# Altium PCB AQCA-Light-Control-A0.PcbDoc (part 2 of 2)
Units mm, origin at the board's own origin, x right, y up, seen from the top; angles counter-clockwise.
Board outline 100 x 100 mm, 2 copper layers (Top Layer, Bottom Layer); 147 components, 99 nets, 439 pads, 162 vias.
Unrouted connection lines stored in the file: 13.
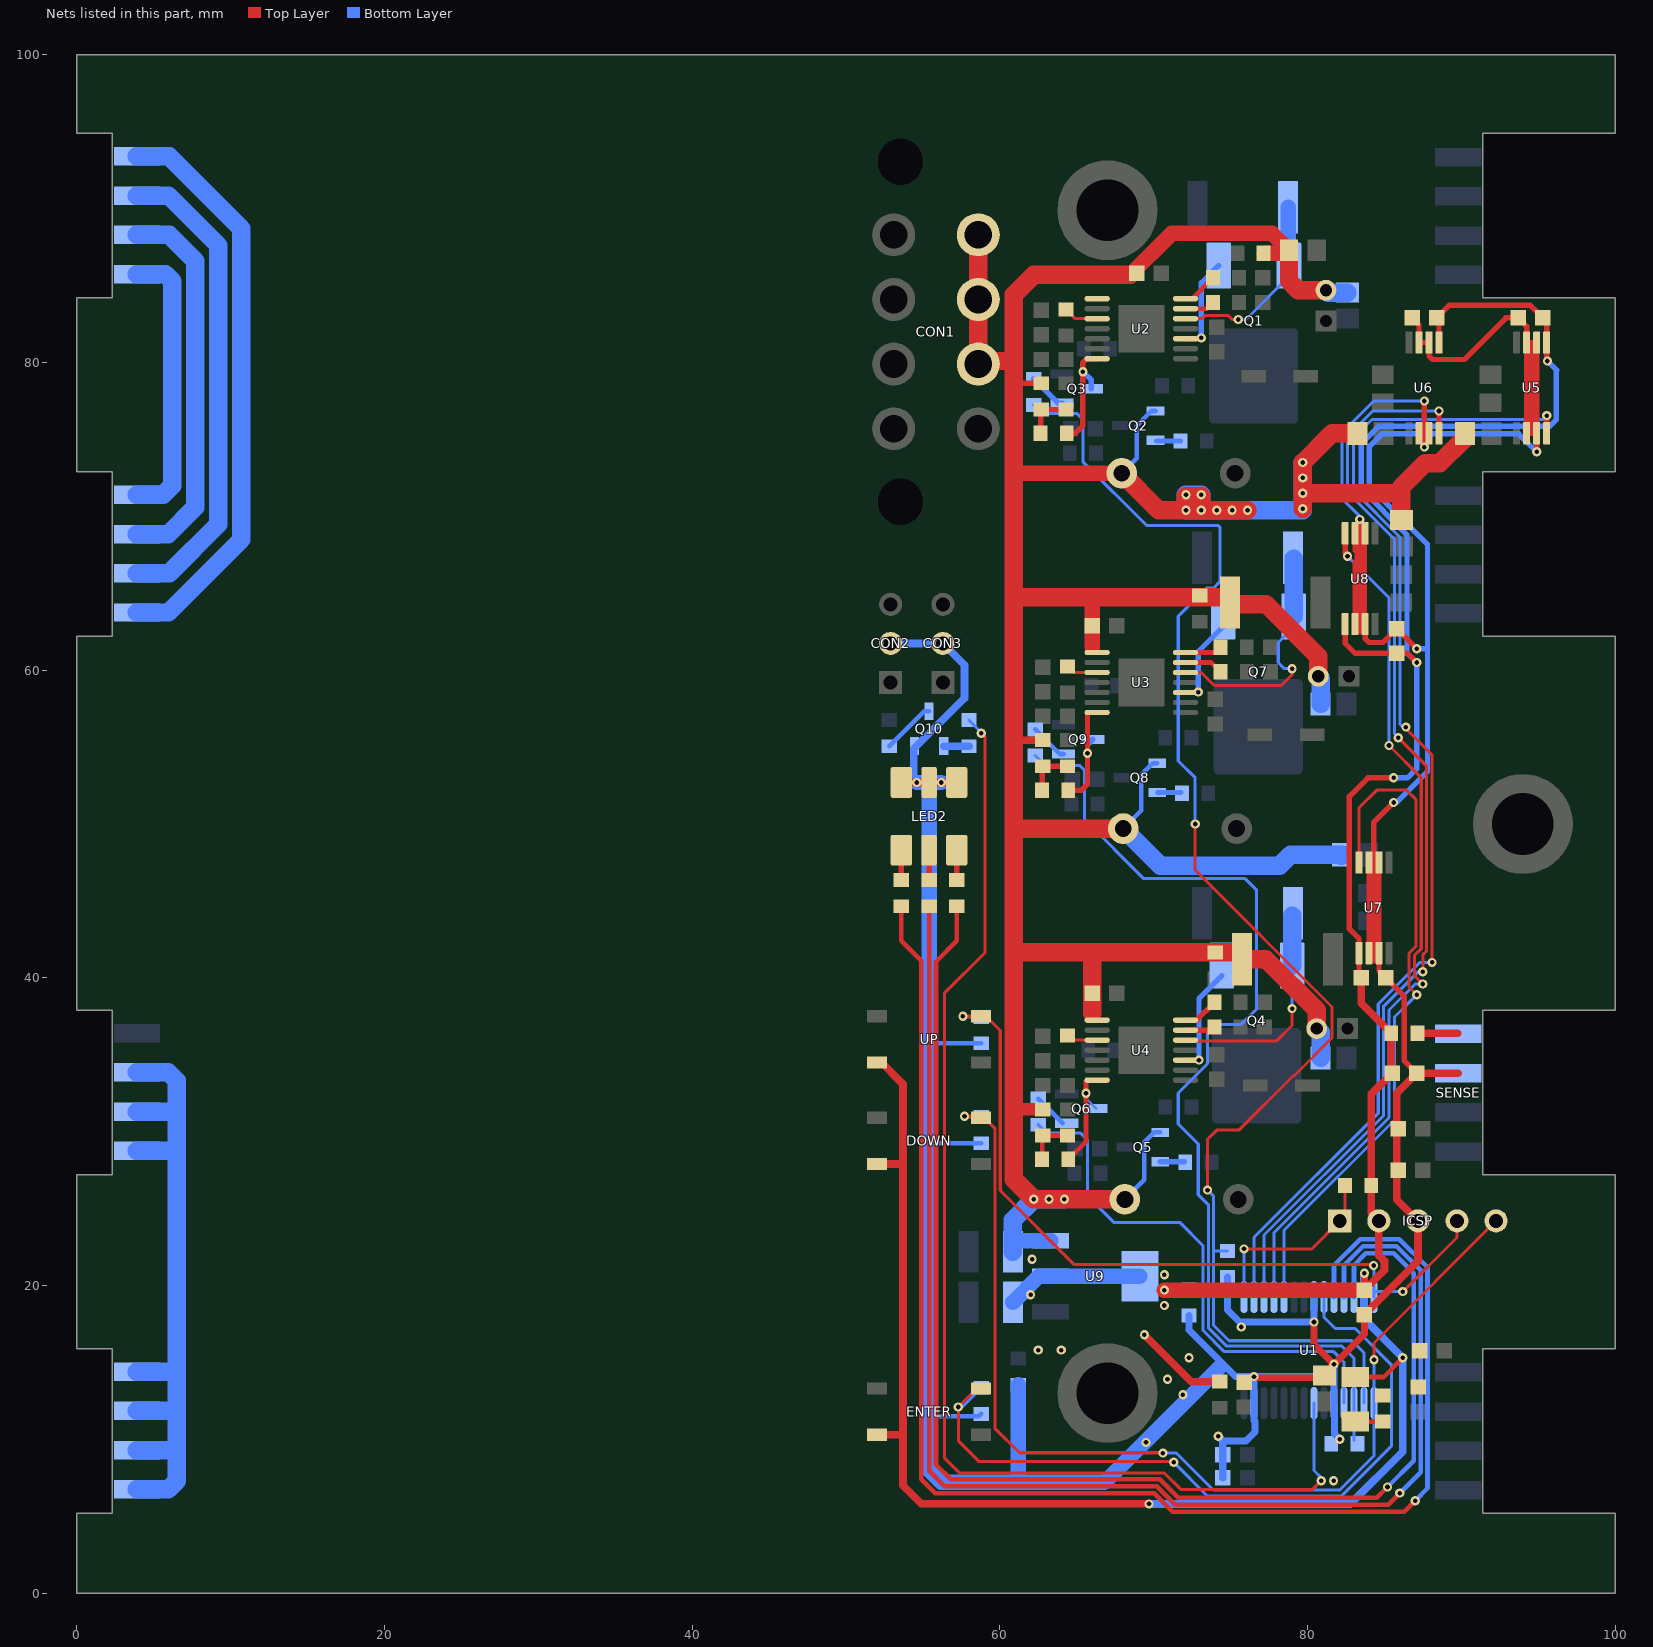
[diagram p2: the nets of this part, all layers, seen from the top]

## Via types
v1: diameter 0.6, hole 0.3, Top Layer to Bottom Layer, tented both sides, 132 vias
v2: diameter 0.5, hole 0.3, Top Layer to Bottom Layer, tented both sides, 27 vias
v3: diameter 0.6, hole 0.3, Top Layer to Bottom Layer, 3 vias

## Nets (pads, with @x,y where several pads share a name; then routed paths per layer and width w, separated by ;. In a path a pad name is that pad's centre, name@x,y a point inside that pad or via, vN(x,y) a via of type N, cw(c..) or ccw(c..) an arc to the next point about the centre after c; other vN are vias at no path point) (continued)
NetDOWN_2: DOWN.4 ICSP.5 R52.2 U1.15 | length 68.6
  Top Layer w0.2: v1(57.7,31) DOWN.4@58.675,31 ; DOWN.4@58.775,30.9 59,30.9 59.677,30.223 59.677,10.723 61.275,9.125 70.575,9.125 v1(70.6,9.1) ; v1(84.325,15.175) 84.325,16.265 ICSP.5@92.26,24.2
  Bottom Layer w0.2: v1(57.7,31) 57.75,30.95 R52.2@58.8,30.95 ; v1(70.6,9.1) 71.481,9.1 73.881,6.7 82.1,6.7 84.325,8.925 U1.15@84.325,12.35 v1(84.325,15.175)
NetENTER_2: ENTER.4 R57.2 U1.9 | length 49.5
  Top Layer w0.2: ENTER.4@58.5,13.3 v1(57.3,12.1) 57.3,9.9 58.652,8.548 71.252,8.548 v1(71.3,8.5) ; ENTER.4@58.775,13.3 ENTER.4@59.1,13.3
  Bottom Layer w0.2: v1(57.3,12.1) 57.55,12.1 R57.2@58.8,13.35 ; v1(71.3,8.5) 73.5,6.3 82.198,6.3 85.452,9.554 85.452,14.848 83.1,17.2 81.8,17.2 81.075,17.925 U1.9@81.075,19.25
NetICSP_1: ICSP.1 R20.1 U1.1 | length 12.1
  Top Layer w0.2: v1(75.875,22.375) 80.275,22.375 ICSP.1@82.1,24.2 ; ICSP.1@82.45,24.55 R20.1@82.45,26.5
  Bottom Layer w0.2: U1.1@75.875,19.25 v1(75.875,22.375)
NetICSP_4: ICSP.4 R51.2 U1.14 UP.4 | length 50.3
  Top Layer w0.2: v1(57.6,37.5) UP.4@58.775,37.5 ; UP.4@59.1,37.5 60.03,36.57 60.03,26.17 64.848,21.352 84.248,21.352 v1(84.3,21.3) ; v1(86.2,19.6) 89.72,23.12 ICSP.4@89.72,24.2
  Bottom Layer w0.2: v1(57.6,37.5) 57.65,37.45 R51.2@58.8,37.45 ; U1.14@84.325,19.25 v1@84.325,21.3 ; U1.14@84.4,19.6 v1(86.2,19.6)
NetLED1_K: LED1.K R53.2 | length 1.8
  Top Layer w0.3: LED1.K@83.1,11.15 R53.2@84.9,11.15
NetLED2_AB: LED2.6 R56.2 | length 1.9
  Top Layer w0.35: R56.2@57.2,46.35 LED2.6@57.2,48.3
NetLED2_AG: LED2.2 R55.2 | length 1.9
  Top Layer w0.35: R55.2@53.6,46.35 LED2.2@53.6,48.3
NetLED2_AR: LED2.4 R54.2 | length 1.9
  Top Layer w0.35: R54.2@55.4,46.35 LED2.4@55.4,48.3
NetLEDAterm_1: pad.1@3.9,63.75 pad.4@3.9,93.4 | length 37.7
  Bottom Layer w1.2: pad.1@3.9,63.75 5.95,63.75 10.7,68.5 10.7,88.7 6,93.4 pad.4@3.9,93.4
NetLEDAterm_2: pad.2@3.9,66.3 pad.3@3.9,90.85 | length 31.4
  Bottom Layer w1.2: pad.2@3.9,66.3 6,66.3 9.2,69.5 9.2,87.6 5.95,90.85 pad.3@3.9,90.85
NetLEDAterm_3: pad.2@3.9,88.3 pad.3@3.9,68.85 | length 25
  Bottom Layer w1.2: pad.3@3.9,68.85 5.95,68.85 7.7,70.6 7.7,86.6 6,88.3 pad.2@3.9,88.3
NetLEDAterm_4: pad.1@3.9,85.75 pad.4@3.9,71.4 | length 18.3
  Bottom Layer w1.2: pad.4@3.9,71.4 5.6,71.4 6.2,72 6.2,85.3 5.75,85.75 pad.1@3.9,85.75
NetQ1_1: Q1.1 U2.10 | length 6.2
  Top Layer w0.35: U2.10@72.075,81.55 73.05,81.55 v1(73.1,81.6)
  Bottom Layer w0.35: v1(73.1,81.6) 73.1,85.175 Q1.1@74.225,86.3
NetQ1_2: Q1.3 R11.2 U2.12 | length 11.8
  Top Layer w0.2: U2.12@72.075,82.85 73.15,82.85 73.352,83.052 74.847,83.052 75.1,82.8 v1(75.5,82.8)
  Bottom Layer w0.2: v1(75.5,82.8) 76,82.8 Q1.3@78.8,85.6
  Bottom Layer w1: Q1.3@78.75,86.35 R11.2@78.75,90.1
NetQ2_2: Q2.2 R9.1 | length 1.6
  Bottom Layer w0.3: Q2.2@70.175,74.9 R9.1@71.75,74.9
NetQ3_1: Q3.1 R14.1 | length 2.5
  Bottom Layer w0.35: R14.1@62.2,78.95 63.8,77.35 Q3.1@64.05,77.35
NetQ3_3: Q3.3 R12.1 U2.7 | length 7.7
  Top Layer w0.35: R12.1@64.35,75.4 64.9,75.4 65.4,75.9 v1(65.4,79.4) 65.4,80 65.65,80.25 U2.7@66.325,80.25
  Bottom Layer w0.35: v1(65.4,79.4) 65.95,78.85 Q3.3@65.95,78.3
NetQ4_1: Q4.1 U4.10 | length 7
  Top Layer w0.35: U4.10@72.075,34.65 v1(72.95,34.65)
  Bottom Layer w0.35: v1(72.95,34.65) 72.95,38.65 Q4.1@74.425,40.125
NetQ4_2: Q4.3 R30.2 U4.12 | length 14.5
  Top Layer w0.2: U4.12@72.075,35.95 72.125,35.9 78,35.9 79,36.9 v1(79,38)
  Bottom Layer w0.2: v1(79,38) Q4.3@79,40.8
  Bottom Layer w1.2: Q4.3@79,40.8 R30.2@79,44.05
NetQ5_2: Q5.2 R28.1 | length 1.6
  Bottom Layer w0.35: Q5.2@70.425,28.05 R28.1@72,28.05
NetQ6_1: Q6.1 R34.1 | length 2.3
  Bottom Layer w0.3: R34.1@62.5,32.15 Q6.1@64.1,30.55
NetQ6_3: Q6.3 R31.1 U4.7 | length 6.8
  Top Layer w0.3: R31.1@64.45,28.2 65.6,29.35 v1(65.6,32.5) U4.7@65.6,33.3
  Bottom Layer w0.2: v1(65.6,32.5) 65.6,32.15 Q6.3@66.25,31.5
NetQ7_1: Q7.1 U3.10 | length 5.9
  Top Layer w0.35: U3.10@72.075,58.55 72.95,58.55 72.927,58.573 v1(72.9,58.573)
  Bottom Layer w0.35: v1(72.9,58.573) 72.9,61.2 Q7.1@74.525,62.825
NetQ7_2: Q7.3 R45.2 U3.12 | length 15.4
  Top Layer w0.2: U3.12@72.075,59.85 73.093,59.85 73.943,59 78.3,59 79,59.7 v1(79,60.1)
  Bottom Layer w0.2: v1(79,60.1) 78.5,60.1 78.1,60.5 78.1,61.8 Q7.3@79,62.7
  Bottom Layer w1.2: Q7.3@79.1,63.5 R45.2@79.1,67.25
NetQ8_2: Q8.2 R43.1 | length 1.6
  Bottom Layer w0.3: Q8.2@70.225,52.05 R43.1@71.8,52.05
NetQ9_1: Q9.1 R49.1 | length 2.5
  Bottom Layer w0.3: R49.1@62.3,56.15 63.9,54.55 Q9.1@64.15,54.55
NetQ9_3: Q9.3 R46.1 U3.7 | length 7.1
  Top Layer w0.35: R46.1@64.45,52.2 65.3,52.2 65.7,52.6 v1(65.7,54.6) U3.7@65.7,57.2
  Bottom Layer w0.35: v1(65.7,54.6) 65.7,55.15 Q9.3@66.05,55.5
NetQ10_1: Q10.3 R62.2 | length 1.6
  Bottom Layer w0.5: Q10.3@56.375,55.05 R62.2@58,55.05
NetQ10_3: Q10.1 R61.1 | length 3.5
  Bottom Layer w0.3: R61.1@52.8,55.05 55.075,57.325 Q10.1@55.4,57.325
NetR3_2: R3.2 U2.14 | length 2.3
  Top Layer w0.3: U2.14@72.075,84.15 72.5,84.15 R3.2@73.85,85.5
NetR5_1: R5.1 U2.13 | length 1.9
  Top Layer w0.3: U2.13@72.075,83.5 73.45,83.5 R5.1@73.85,83.9
NetR8_1: R8.1 U2.3 | length 2.3
  Top Layer w0.2: R8.1@64.3,83.45 64.9,82.85 U2.3@66.325,82.85
NetR10_1: R10.1 R12.2 R13.2 | length 3.2
  Top Layer w0.35: R12.2@62.65,75.4 62.65,76.9 R10.1@62.7,76.95 R13.2@64.3,76.95
NetR14_2: R14.2 R58.1 U1.16 | length 93.5
  Top Layer w0.2: v1(72.7,50) 72.7,47.005 81.6,38.105 81.6,36.1 79.152,33.652 79.095,33.652 75.543,30.1 74.1,30.1 73.5,29.5 v1(73.5,26.2)
  Bottom Layer w0.2: R14.2@62.2,77.25 62.75,76.7 65,76.7 65.4,76.3 65.4,73.554 69.554,69.4 74.2,69.4 74.3,69.3 74.3,65.743 73.905,65.348 73.448,65.348 71.6,63.5 71.6,54.1 72.7,53 v1(72.7,50) ; v1(73.5,26.2) 73.905,25.795 73.905,17.395 74.895,16.405 82.895,16.405 83.675,15.625 U1.16@83.675,12.35 ; 73.955,22.25 R58.1@74.8,22.25
NetR19_2: R19.2 SENSE.1 | length 2.6
  Top Layer w0.5: R19.2@87.15,36.4 89.75,36.4
NetR23_2: R23.2 U4.14 | length 2.4
  Top Layer w0.35: U4.14@72.075,37.25 72.8,37.25 R23.2@73.95,38.4
NetR25_1: R25.1 U4.13 | length 2
  Top Layer w0.35: U4.13@72.075,36.6 73.75,36.6 R25.1@73.95,36.8
NetR27_1: R27.1 U4.3 | length 1.6
  Top Layer w0.2: R27.1@64.7,35.95 U4.3@66.325,35.95
NetR29_1: R29.1 R31.2 R33.2 | length 3.2
  Top Layer w0.3: R31.2@62.75,28.2 62.75,29.7 R29.1@62.8,29.75 R33.2@64.4,29.75
NetR34_2: R34.2 R59.1 U1.18 | length 35.2
  Bottom Layer w0.2: R34.2@62.5,30.45 63.05,29.9 65.257,29.9 65.7,29.457 65.7,25.8 67.4,24.1 71.7,24.1 73.2,22.6 73.2,17.1 74.6,15.7 81.7,15.7 82.375,15.025 U1.18@82.375,12.35 ; R59.1@72.3,19.75 73.15,19.75
NetR38_2: R38.2 U3.14 | length 2.4
  Top Layer w0.3: U3.14@72.075,61.15 74,61.15 R38.2@74.35,61.5
NetR40_1: R40.1 U3.13 | length 2.4
  Top Layer w0.3: U3.13@72.175,60.5 73.75,60.5 R40.1@74.35,59.9
NetR42_1: R42.1 U3.3 | length 2.1
  Top Layer w0.2: R42.1@64.4,60.25 64.8,59.85 U3.3@66.325,59.85
NetR44_1: R44.1 R46.2 R48.2 | length 3.2
  Top Layer w0.35: R46.2@62.75,52.2 62.75,53.7 R44.1@62.8,53.75 R48.2@64.4,53.75
NetR49_2: R49.2 R60.1 U1.17 | length 68
  Bottom Layer w0.2: R49.2@62.3,54.45 62.95,53.8 65.2,53.8 65.5,53.5 65.5,50.3 69.352,46.448 75.952,46.448 76.7,45.7 76.7,37.977 75.7,36.977 73.865,36.977 73.502,36.614 73.502,34.419 71.6,32.516 71.6,30.5 72.9,29.2 72.9,25.9 73.552,25.248 73.552,17.248 74.748,16.052 82.248,16.052 83.025,15.275 U1.17@83.025,12.35 R60.1@83.025,9.925
NetR54_1: R54.1 U1.11 | length 91.8
  Top Layer w0.3: R54.1@55.4,44.65 55.4,7.948 56.402,6.945 70.215,6.945 71.413,5.748 85.248,5.748 v1(86,6.5)
  Bottom Layer w0.3: U1.11@82.375,19.25 82.375,21.315 83.613,22.552 85.787,22.552 87.352,20.987 87.352,7.852 v1(86,6.5)
NetR55_1: R55.1 U1.10 | length 96.2
  Top Layer w0.3: R55.1@53.6,44.65 53.6,42.4 54.9,41.1 54.9,7.4 55.807,6.493 70.028,6.493 71.225,5.295 86.295,5.295 v1(87,6)
  Bottom Layer w0.3: U1.10@81.725,19.25 81.725,21.305 83.425,23.005 85.975,23.005 87.805,21.175 87.805,6.805 v1(87,6)
NetR56_1: R56.1 U1.12 | length 88.8
  Top Layer w0.3: R56.1@57.2,44.65 57.2,42.4 55.852,41.052 55.852,8.348 56.802,7.398 70.402,7.398 71.6,6.2 84.5,6.2 v1(85.2,6.9)
  Bottom Layer w0.3: U1.12@83.025,19.25 83.025,21.325 83.8,22.1 85.6,22.1 86.9,20.8 86.9,8.6 v1(85.2,6.9)
NetR62_1: R62.1 U1.21 | length 80.2
  Top Layer w0.2: v1(58.8,55.9) 59.048,55.652 59.048,41.646 56.395,38.994 56.395,8.805 57.4,7.8 70.702,7.8 71.754,6.748 80.347,6.748 v1(80.9,7.3)
  Bottom Layer w0.2: R62.1@58,56.75 58.8,55.95 v1(58.8,55.9) ; U1.21@80.425,12.35 80.425,7.975 80.9,7.5 v1@80.9,7.4
NetSENSEterm_1: pad.1@3.9,6.75 pad.1@3.9,28.75 pad.2@3.9,9.3 pad.2@3.9,31.3 pad.3@3.9,11.85 pad.3@3.9,33.85 pad.4@3.9,14.4 | length 44.5
  Bottom Layer w1.2: pad.1@3.9,6.75 5.95,6.75 6.5,7.3 6.5,9.3 ; pad.2@3.9,9.3 6.5,9.3 ; pad.3@3.9,11.85 6.45,11.85 ; pad.4@3.9,14.4 6.5,14.4 ; pad.1@3.9,28.75 6.45,28.75 ; pad.2@3.9,31.3 6.4,31.3 ; pad.3@3.9,33.85 5.95,33.85 6.5,33.3 6.5,14.4 ; 6.5,9.3 6.5,14.4
NetU1_2: U1.2 U5.4 | length 77.6
  Top Layer w0.2: v1(86.4,56.3) 86.4,56.2 88.1,54.5 v1(88.1,41)
  Top Layer w0.35: U5.4@95.55,75.4 v1(95.55,76.55)
  Bottom Layer w0.2: U1.2@76.525,19.25 76.525,23.125 84.6,31.2 84.6,38.3 87.3,41 v1(88.1,41) ; v1(86.4,56.3) 86.205,56.3 86.005,56.5 86.005,68.66 83,71.665 83,75.102 84.196,76.298 95.298,76.298 v1(95.55,76.55)
NetU1_3: U1.3 U6.4 | length 70.7
  Top Layer w0.2: v1(85.9,55.6) 87.748,53.752 87.748,41.748 87.5,41.5 v1@87.5,40.4
  Top Layer w0.35: U6.4@88.55,75.4 v1@88.55,76.65
  Bottom Layer w0.2: U1.3@77.175,19.25 77.175,23.277 84.952,31.054 84.952,38.152 87.2,40.4 v1@87.5,40.4 ; v1(85.9,55.6) 85.652,55.847 85.652,68.514 82.6,71.566 82.6,75.2 84.25,76.85 v1(88.55,76.85) ; v1@88.4,76.8 v1@88.55,76.65
  other v1: 87.5,40.4
NetU1_4: U1.4 U8.4 | length 56.4
  Top Layer w0.2: v1(85.3,55.1) 87.395,53.005 87.395,41.894 86.947,41.446 86.947,40.153 v1(87.5,39.6)
  Top Layer w0.35: U8.4@82.45,68.9 82.45,67.55 v1(82.6,67.4)
  Bottom Layer w0.2: U1.4@77.825,19.25 77.825,23.428 85.305,30.908 85.305,37.905 87,39.6 v1(87.5,39.6) ; v1(82.6,67.4) 85.3,64.7 v1(85.3,55.1)
NetU1_5: U1.5 U7.4 | length 44.3
  Top Layer w0.2: U7.4@83.35,47.5 83.35,51.05 84.5,52.2 86.443,52.2 87.043,51.6 87.043,42.04 86.595,41.592 86.595,39.405 v1(87.1,38.9)
  Bottom Layer w0.2: U1.5@78.475,19.25 78.475,23.58 85.657,30.762 85.657,37.457 v1(87.1,38.9)
V12: C2.2 C3.2 C4.2 C15.2 C16.2 C17.2 C24.2 C25.2 C26.2 C33.1 C34.2 C35.2 C36.2 C37.2 CON1.1 CON1.2 CON1.3 L1.1 L2.1 L3.1 Q2.3 Q5.3 Q8.3 R4.1 R7.2 R10.2 R24.1 R26.2 R29.2 R39.1 R41.2 R44.2 U2.1 U3.1 U4.1 U9.3 | length 265.1
  Top Layer w0.35: 60.9,78.65 R10.2@62.7,78.65
  Top Layer w0.5: 60.95,55.45 R44.2@62.8,55.45
  Top Layer w0.8: 60.95,31.45 R29.2@62.8,31.45 ; C24.2@80.7,59.6 C24.2@80.7,59.781
  Top Layer w1: 61.1,72.8 L1.1@67.925,72.8 ; 66,61.5 C26.2@66,62.9 66,64.75 ; C4.2@68.477,85.7 71.177,88.4 77.7,88.4 R4.1@78.8,87.3 ; R7.2@77.2,87.1 R4.1@78.6,87.1
  Top Layer w1.2: CON1.1@58.6,88.3 CON1.2@58.6,84.1 CON1.3@58.6,79.9 58.8,80.1 60.9,80.1 ; 60.95,41.65 66,41.65 ; 60.95,64.75 66,64.75 R39.1@74.8,64.75 ; 61,49.7 L2.1@68.025,49.7 ; 66,37.7 C17.2@66,39 66,41.65 ; L1.1@67.925,72.8 70.325,70.4 v1(72.1,70.4) ; L3.1@68.125,25.6 v1(62.2,25.6) 60.9,26.9 60.9,78.65 60.9,80.1 ; C4.2@68.477,85.7 62.2,85.7 60.9,84.4 60.9,80.1 ; R39.1@74.95,64.3 77.297,64.3 80.7,60.897 C24.2@80.7,59.781 ; R24.1@75.7,41.65 R26.2@74,41.65 66,41.65 ; R24.1@75.75,41.2 77.3,41.2 80.6,37.9 C15.2@80.6,36.7 ; v1(76.1,70.4) v1(75.1,70.4) v1(74.1,70.4) v1(73.1,70.4) ; R4.1@78.8,87.3 78.8,85.3 79.4,84.7 C2.2@80.8,84.7 ; v1(79.7,70.5) v1(79.7,71.5) ; C34.2@83.25,75.4 81.6,75.4 v1(79.7,73.5) v1(79.7,72.5) v1(79.7,71.5) ; C36.2@86.1,69.75 86.1,71.5 ; C33.1@90.188,75.05 88.585,73.448 87.648,73.448 86.1,71.9 86.1,71.5 ; C33.1@90.25,75.05 C33.1@90.25,75.4 ; v1(72.1,70.4) v1(73.1,70.4) ; v1(72.1,70.4) 72.1,71.3 73.1,71.3 v1(73.1,70.4) ; v1(79.7,71.5) 86.1,71.5
  Bottom Layer w0.3: L1.1@67.925,72.8 68.9,73.775 68.9,75.9 69.85,76.85 Q2.3@70.125,76.85 ; L2.1@68.025,49.7 69.2,50.875 69.2,53.2 69.95,53.95 Q8.3@70.225,53.95 ; L3.1@68.125,25.6 69.4,26.875 69.4,29.3 70.05,29.95 Q5.3@70.425,29.95
  Bottom Layer w1: C37.2@61,22.9 U9.3@63.3,22.9
  Bottom Layer w1.2: C37.2@60.85,22.2 60.85,24.25 v1(62.2,25.6) v1(63.2,25.6) v1(64.2,25.6) ; L2.1@68.025,49.7 70.425,47.3 78.2,47.3 78.9,48 C35.2@82.145,48 ; v1(79.7,73.5) v1(79.7,72.5) v1(79.7,71.5) v1(79.7,70.5) 79.7,70.4 v1(76.1,70.4) v1(75.1,70.4) v1(74.1,70.4) v1(73.1,70.4) ; C15.2@80.6,36.7 80.85,36.45 C16.2@80.85,34.8 ; C24.2@80.7,59.6 80.85,59.45 C25.2@80.85,57.8 ; C2.2@81.2,84.7 81.35,84.55 C3.2@82.6,84.55 ; C35.2@82.198,47.948 C35.2@82.25,48 ; v1(73.1,70.4) v1(73.1,71.4) v1(72.1,71.4) v1(72.1,70.4) v1(73.1,70.4)
VDD: C1.1 C9.1 C12.1 C14.2 C18.1 C27.1 C38.2 DOWN.1 ENTER.1 ICSP.2 LED1.A R18.2 R19.1 R20.2 U1.13 U5.5 U6.5 U7.5 U8.5 U9.2 U9.4 UP.1 | length 209.1
  Top Layer w0.3: LED1.A@83.1,14.05 84.95,14.05 v1(86.2,15.3)
  Top Layer w0.35: U8.5@82.45,63 82.45,61.75 83.1,61.1 C27.1@85.8,61.1 86.5,61.1 v1(87.1,60.5) ; C18.1@83.35,40.15 U7.5@83.35,41.6 83.35,42.55 82.725,43.175 82.725,51.8 83.925,53 v1(85.6,53) ; C9.1@88.4,82.9 89.227,83.727 94.473,83.727 C1.1@95.3,82.9 ; U6.5@88.55,81.3 C9.1@88.55,82.75 ; v1@95.55,80.15 U5.5@95.55,81.3 C1.1@95.55,82.65
  Top Layer w0.45: C12.1@83.7,19.7 v1(83.7,20.8)
  Top Layer w0.5: ENTER.1@52.025,10.3 53.7,10.3 ; DOWN.1@52.025,27.9 53.7,27.9 ; UP.1@52.025,34.5 52.3,34.5 53.7,33.1 53.7,7 54.9,5.8 v1(69.7,5.8) ; v1(69.4,16.8) 72.45,13.75 R18.2@74.3,13.75 ; C18.1@83.5,40 83.5,38.35 R19.1@85.45,36.4 C14.2@85.45,33.85 ; C12.1@83.7,19.7 85.002,21.002 85.002,21.591 84.64,21.953 ICSP.2@84.64,24.2 84.15,24.69 R20.2@84.15,26.5 84.15,32.45 C14.2@85.5,33.8
  Top Layer w1: v1(70.7,19.7) C12.1@83.7,19.7
  Bottom Layer w0.35: v1(85.6,53) 86.5,53 87.1,53.6 v1(87.1,60.5) 86.472,61.128 86.472,68.797 83.5,71.769 83.5,74.731 84.639,75.87 95.757,75.87 96.177,76.29 96.177,79.477 96.2,79.5 v1(95.6,80.1)
  Bottom Layer w0.5: v1(69.7,5.8) 69.702,5.798 82.798,5.798 86.2,9.2 v1(86.2,15.3) 83.675,17.825 U1.13@83.675,19.25 83.675,20.775 v1(83.7,20.8)
  Bottom Layer w1: C38.2@60.85,18.9 62.55,20.6 U9.2@63.3,20.6 U9.4@69.1,20.6
  other v1: 70.9,13.9 72.3,15.3 62.5,15.8 64,15.8 70.7,18.7 62,19.4 70.7,20.7 62.1,21.7
VSS: C1.2 C9.2 C11.2 C12.2 C13.2 C14.1 C18.2 C27.2 C39.2 C40.2 C41.2 C42.2 C43.2 C44.2 CON2.2 CON3.2 ICSP.3 LED2.1 LED2.3 LED2.5 Q10.2 R17.1 R51.1 R52.1 R53.1 R57.1 R58.2 R59.2 R60.2 SENSE.2 U1.8 U1.19 U1.27 U5.2 U5.3 U5.6 U5.7 U6.2 U6.3 U6.6 U6.7 U7.2 U7.3 U7.6 U7.7 U8.2 U8.3 U8.6 U8.7 | length 316.6
  Top Layer w0.35: U8.6@83.1,63 83.1,67.013 83.227,67.14 83.227,67.673 83.1,67.8 U8.3@83.1,68.9 ; 83.4,62.5 83.4,69.4 ; U8.2@83.7,68.9 83.7,63.05 U8.7@83.75,63 83.75,62.05 84,61.8 84.9,61.8 C27.2@85.8,62.7 v1(87.1,61.4) ; 84.3,41.1 84.3,41.6 ; U7.2@84.6,47.5 84.3,47.5 ; U7.2@84.65,47.5 U7.7@84.65,41.6 ; v1(85.6,51.4) 84.3,50.1 84.3,47.5 ; C9.2@86.8,82.9 87.25,82.45 U6.7@87.25,81.3 U6.6@87.9,81.3 87.9,80.427 88.127,80.2 90.2,80.2 92.9,82.9 C1.2@93.7,82.9 94.25,82.35 U5.7@94.25,81.3 ; C14.1@87.1,33.8 86.3,34.6 86.3,38.8 C18.2@85.1,40 84.65,40.45 U7.7@84.65,41.6 ; U6.2@87.25,75.4 87.6,75.4 ; v1(87.6,74.5) 87.6,75.4 ; v1(87.6,77.5) 87.6,75.4 ; U6.3@87.9,75.4 87.6,75.4 ; U5.2@94.25,75.4 U5.7@94.25,81.3 ; U5.2@94.3,75.4 94.6,75.4 ; 94.6,81.275 94.6,75.4 ; v1(94.9,74.2) U5.3@94.9,75.4 ; 84.3,41.6 84.3,47.5 ; 84.3,41.6 U7.7@84.65,41.6 ; 84.3,41.6 U7.6@84,41.6 U7.3@84,47.5 84.3,47.5 ; U5.7@94.25,81.3 U5.6@94.9,81.3 U5.3@94.9,75.4 ; 94.6,75.4 U5.3@94.9,75.4
  Top Layer w0.45: C11.2@76.2,14 80.95,14 C13.2@81.1,14.15 ; v1(80.425,17.625) 80.425,16.175 v1(81.725,14.875) 83.7,16.85 C12.2@83.7,18.1
  Top Layer w0.5: LED2.1@53.6,52.7 LED2.3@55.4,52.7 LED2.5@57.2,52.7 LED2.5@57.2,52.4 ; C11.2@75.89,13.802 C11.2@75.9,13.792 ; C13.2@81.1,14.15 81.1,14.25 v1(81.725,14.875) ; C12.2@83.752,18.1 C12.2@83.7,18.1 87.18,21.58 ICSP.3@87.18,24.2 85.8,25.58 85.8,32.5 C14.1@87.1,33.8 89.8,33.8
  Bottom Layer w0.2: v1(83.4,69.8) 83.4,70 82.248,71.152 82.248,75.433 84.314,77.5 v1(87.6,77.5)
  Bottom Layer w0.3: 55.45,29.25 R52.1@58.8,29.25 ; 55.45,35.75 R51.1@58.8,35.75 ; 55.498,11.498 58.648,11.498 R57.1@58.8,11.65
  Bottom Layer w0.35: v1(85.6,51.4) 85.78,51.4 87.8,53.42 87.8,68.18 84.025,71.955 84.025,74.545 84.848,75.368 87.6,75.368 ; v1(87.1,61.4) 87.8,61.4 ; v1(87.6,74.5) 87.6,75.368 ; v1(94.9,74.2) 93.732,75.368 87.6,75.368
  Bottom Layer w0.45: R59.2@72.3,18.05 72.3,17.1 75.325,14.075 v1(76.525,14.075) ; 74.5,9.9 76,9.9 76.577,10.477 76.577,11.181 76.525,11.233 U1.27@76.525,12.35 v1(76.525,14.075) ; R58.2@74.8,20.55 74.8,18.4 75.575,17.625 v1(80.425,17.625) U1.8@80.425,19.25 ; 81.7,14.075 v1(76.525,14.075) ; v1(81.725,14.875) U1.19@81.725,12.35 81.752,12.323 81.752,10.348 v1(82.1,10)
  Bottom Layer w0.5: CON2.2@52.9,61.74 CON3.2@56.3,61.74 57.7,60.34 57.7,58.181 54.4,54.881 v1@54.4,52.9 ; v1(74.2,10.2) 74.5,9.9 C42.2@74.5,9 C41.2@74.5,7.5
  Bottom Layer w1: v1(54.6,52.7) 55.4,52.7 ; v1(56.2,52.7) 55.4,52.7 ; R17.1@61.2,13.55 61.2,7.2 ; 74.3,14.7 66.8,7.2 61.2,7.2 ; 55.4,52.7 55.4,8 56.2,7.2 61.2,7.2
  other v1: 81.7,7.3 69.5,9.8 71.9,12.9 75.7,17.3
pads on no net: CON1. DOWN.2 DOWN.3 ENTER.2 ENTER.3 MH1.1 MH2.1 MH3.1 U2.8 U3.8 U4.8 UP.2 UP.3

## Polygon pours and split planes (outlines as drawn)
VDD on Bottom Layer "Top Layer-No Net" (solid, remove dead copper, pour order 47): 61.6,22.3 61.6,20.3 61.3,20.2 61.6,15.2 68.1,15.2 70.1,13.2 71.1,13.2 72.9,15 72.9,15.9 71.7,17.1 71.7,20.3 73.2,20.3 73.2,22.6 71.7,24.1 67.4,24.1 65.7,25.8 65.7,22.7 65.3,22.3
V12 on Bottom Layer "Top Layer-No Net" (solid, remove dead copper, pour order 46): 64.5,22.4 65,22.4 65.4,22.8 65.4,26.2 62,26.2 60.2,24.4 60.2,23.3 60.2,20.9 61.5,20.9 61.5,22.4
GND on Bottom Layer "Top Layer-No Net" (solid, remove dead copper, pour order 45): 59.9,65.6 60.4,65.6 60.4,30 62.95,30 63.05,29.9 65.257,29.9 65.7,29.457 65.7,26.4 62,26.4 59.3,23.7 59.3,19.2 59.3,17.2 59.3,16.6 58.6,16.6 57.6,17.6 57.6,24.4 57.6,24.6 60.2,27.2 60.2,36.7 59.9,37 59.9,37.2
AGND3 on Bottom Layer "Top Layer-No Net" (solid, remove dead copper, pour order 31): 66.2,37 61.8,37 61.8,29.4 65.7,29.4 65.7,26.8 65.7,26.5 67,26.5 67.4,26.9 67.425,26.875 69.4,26.875 69.4,29.3 70.4,30.3 70.4,31.9 70.4,31.95 69.65,32.7 67.7,32.7 66.6,33.8 66.6,35.8 66.348,36.052 66.2,36.052
GND on Bottom Layer "Top Layer-No Net" (solid, remove dead copper, pour order 28): 70.75,31.6 71.6,31.6 71.6,32.516 73.502,34.419 73.502,36.614 73.865,36.977 75.7,36.977 76.7,37.977 76.7,45.7 75.952,46.448 69.4,46.448 69.352,46.448 65.5,50.3 65.5,53.5 65.2,53.8 62.95,53.8 62.35,54.4 60.9,54.4 60.9,37.3 66.5,37.3 66.5,36.3 66.5,36.2 66.8,35.9 66.8,33.9 67.8,32.9 69.7,32.9 69.7,32.65 70.75,31.6
AGND2 on Bottom Layer "Top Layer-No Net" (solid, remove dead copper, pour order 30): 66.5,61 61.8,61 61.8,56.2 61.85,56.15 62.3,56.15 63.9,54.55 63.95,54.5 64.9,54.5 64.9,53.8 65.2,53.8 65.5,53.5 66.05,52.95 66.35,52.95 67.925,52.95 67.975,53 67.975,55.875 67.975,56.475 68,56.5 67.6,56.5 66.8,57.3 66.8,61
GND on Bottom Layer "Top Layer-No Net" (solid, remove dead copper, pour order 33): 61.5,61.4 61.5,61.3 67.1,61.3 67.1,59.7 66.9,59.5 66.8,59.5 66.8,57.3 67.6,56.5 69.85,56.5 70.75,55.6 71.6,55.6 71.6,63.5 73.448,65.348 73.905,65.348 74.3,65.743 74.3,69.3 74.2,69.4 69.554,69.4 65.4,73.554 65.4,76.3 65,76.7 62.75,76.7 62.2,77.25 62.15,77.2 61.4,77.2
GND on Bottom Layer "Top Layer-No Net" (solid, remove dead copper, pour order 35): 61.5,85.2 66.2,85.2 66.2,81.7 66.3,81.6 66.3,80 67,79.3 69.75,79.3 70.55,78.5 72.25,78.5 72.6,78.5 72.6,85 72.6,87.7 73.1,88.2 74.8,88.2 74.8,94.9 61.5,94.9
GND on Bottom Layer "Top Layer-No Net" (solid, remove dead copper, pour order 43): 51,94.9 51,65.9 60,65.9 60,94.9
GND on Bottom Layer "Top Layer-No Net" (solid, remove dead copper, pour order 34): 59.9,65.4 59.9,94.9 61.6,94.9 61.8,94.7 61.8,85.2 61.7,85.2 60.9,84.4 60.9,65.4
AGND1 on Bottom Layer "Top Layer-No Net" (solid, remove dead copper, pour order 32): 62.6,84.8 65.9,84.8 65.9,80.4 67,79.3 67.9,79.3 67.9,75.925 67.875,75.9 65.4,75.9 65.4,76.3 65,76.7 62.7,76.7 61.8,77.6 61.8,84
VSS on Bottom Layer "Top Layer-No Net" (solid, remove dead copper, pour order 29): 74.8,20.55 73.25,20.55 73.2,20.6 73.2,18.1 71.8,18.1 71.8,17 75.6,13.2 75.85,12.95 75.85,10.2 75.85,7.05 75.9,7 82.4,7 85.5,10.1 85.5,15 85.5,15.1 83,17.6 82.775,17.825 81.075,17.825 80.9,17.825 80.425,18.3 75.8,18.3 75.5,18.3 75.3,18.5 75.3,20.3 74.3,20.3
VSS on Bottom Layer "Top Layer-No Net" (solid, remove dead copper, pour order 49): 62.5,5.1 69.005,5.1 69.702,5.798 77.1,5.798 77.1,6.298 77.102,6.3 75.964,7.438 75.964,8.3 75.964,13.236 73.1,16.1 72.9,15.9 72.9,15.667 72.9,15 71.1,13.2 70.397,13.2 66.5,13.2 64.6,15.1 63.2,15.1 63.2,8.2 62.5,7.5 62.4,7.4 62.4,5.1
VDD on Top Layer "Top Layer-No Net" (solid, remove dead copper, pour order 54): 72.8,21.1 83.7,21.1 84.8,21.1 84.8,20.8 83.7,19.7 72.8,19.7
GND on Top Layer "Top Layer-No Net" (solid, remove dead copper, pour order 53): 66.8,40.8 66.8,37.6 67,37.6 67.2,37.4 67.2,33.5 67,33.3 65.6,33.3 65.6,29.35 66.35,28.6 73.5,28.6 73.5,29.5 74.1,30.1 75.543,30.1 76.7,31.257 75.7,32.2 75.1,34 74.6,34.5 72.6,35.9 72.8,36.1 72.8,37.25 73.95,38.4 73.8,38.55 73.8,40.4 73.4,40.8
GND on Top Layer "Top Layer-No Net" (solid, remove dead copper, pour order 52): 66.5,63.7 72.348,63.7 72.45,63.7 73.752,62.398 74,62.15 74,61.15 71.25,61.15 71.2,61.2 71.2,58.5 72.827,58.5 72.9,58.573 73.327,59 73.943,59 78.3,59 79.2,58.1 79.2,56.2 79.2,55.1 78.6,54.5 76.1,52 74.2,52 73.5,51.3 64.9,51.3 64.9,52.2 65.3,52.2 65.7,52.6 65.7,57.2 66.7,57.2 67.2,57.7 67.2,61.2 66.6,61.2 66.5,61.1
V12 on Top Layer "Top Layer-No Net" (solid, remove dead copper, pour order 36): 61.7,74.5 77,74.5 77,69.5 79.6,66.9 79.6,62.8 80,62.4 81.2,62.4 81.6,62 81.6,58.9 81.3,58.6 79.7,58.6 79.3,59 79.3,61 77.6,62.7 73.9,62.7 73.7,62.9 73.7,63.7 66.4,63.7 66.4,61.3 61.4,61.3
V12 on Top Layer "Top Layer-No Net" (solid, remove dead copper, pour order 38): 60,94.9 79.4,94.9 79.4,85.9 78.2,85.9 78.2,86 76.7,87.5 76.7,87.6 76.5,87.8 73.1,87.8 71.8,86.5 70,86.5 69.4,85.9 69.4,84.3 69.2,84.1 65.8,84.1 65.5,84.4 60,84.4
VDD on Top Layer "Top Layer-No Net" (solid, remove dead copper, pour order 48): 72.9,21.352 72.9,15 71.1,13.2 70.1,13.2 66.8,13.2 64.7,15.3 61.9,15.3 59.677,15.3 59.677,26.3 59.9,26.3 60.03,26.17 64.848,21.352
V12 on Top Layer "Top Layer-No Net" (solid, remove dead copper, pour order 40): 60,26.9 60,23.5 62.7,23.5 64.848,21.352 67.2,21.352 67.2,19 67.7,18.5 71,18.5 71,28.4 66.2,28.4 65.4,27.6 61.5,27.6
V12 on Top Layer "Top Layer-No Net" (solid, remove dead copper, pour order 37): 62.2,78.2 61.9,78.2 61.9,74.5 62,74.4 62,63.7 61.3,63.7 61.4,63.8 61.4,79.1 62.2,79.1
V12 on Top Layer "Top Layer-No Net" (solid, remove dead copper, pour order 39): 60,85.2 60.4,85.2 60.4,26.9 60,26.9
V12 on Top Layer "Top Layer-No Net" (solid, remove dead copper, pour order 41): 61.4,37.3 65.6,37.3 66.8,37.3 66.8,40.8 74.7,40.8 75.2,40.3 76,39.5 76.3,39.5 77.9,39.5 79.5,37.9 79.8,37.6 79.8,36.7 79.8,36.5 80.3,36 80.9,35.4 80.9,35.5 81.6,36.2 81.6,38.105 72.7,47.005 72.7,50 72.7,51.3 61.3,51.3
V12 on Top Layer "Top Layer-No Net" (solid, remove dead copper, pour order 44): 60.3,94.9 55.8,94.9 55.8,77.468 56.096,77.169 56.195,77.069 58.562,77.069 58.562,76.498 60.3,74.8
GND on Top Layer "Top Layer-No Net" (solid, remove dead copper, pour order 51): 71.8,86.5 70,86.5 69.4,85.9 69.4,84.3 69.2,84.1 67.2,84.1 67.2,80.8 67,80.6 67,80.2 65.7,80.2 65.65,80.25 65.4,80 65.4,75.9 64.9,75.4 64.9,74.7 75.1,74.7 79.5,79.1 79.5,79.5 79.5,83.1 74.4,83.1 74.4,86.1 76.3,88 73.3,88
VSS on Top Layer "Top Layer-No Net" (solid, remove dead copper, pour order 50): 72.8,19.3 84.2,19.3 84.2,19.9 84.2,20.2 85.002,21.002 85.005,21 86.6,21 86.74,21 87.9,19.84 88.1,19.64 88.1,15.3 88.1,5.1 69.7,5.1 69.7,6.425 67,9.125 67,10 67.197,10 70.397,13.2 71.1,13.2 71.1,13.206 72.9,15.006 72.8,15.106 72.8,19.3
VSS on Bottom Layer "Top Layer-No Net" (solid, remove dead copper, shelved, pour order 42): 51,65.6 59.7,65.6 59.6,65.5 59.6,36.65 60,36.25 60,17.2 61.78,15.1 63.2,15.1 63.2,8 62.5,7.3 62.5,5.1 51,5.1

## Other copper
Top Layer:
  rectangle net VSS: 87.4,80.6 87.7,82
  rectangle net V12: 76.7,87.6 77.8,87.9
  rectangle net V12: 65.5,61.1 66.5,61.6

## Silkscreen, mask and mechanical layers (free items; w line width, h text height)
Top Overlay:
  drawing of 50 lines, arcs and shapes, not listed
  text "CUTOUT" at 1.6,86.6 h2 r90
  text "CUTOUT" at 96.4,86.5 h2 r90
  text "Light System" at 6.4,84.6 h3 r270
  text "AQCA" at 8.7,82.3 h4 r270
  text "RXD" at 50.3,65.6 h2 r270
  text "CUTOUT" at 1.6,65 h2 r90
  text "CUTOUT" at 96.2,65 h2 r90
  text "AQCA-Ctl" at 58.2,64.8 h2 r270
  text "Terminator" at 6.9,60.6 h5 r270
  text "TXD" at 50.3,60.4 h2 r270
  text "AQCA" at 89.2,57.8 h4
  text "D58483-A" at 28.3,57.1 h2
  text "Light System" at 86.9,55.5 h3
  text "Status" at 52.4,54.4 h3
  text "LC-375" at 90.5,43 h3
  text "rev. A0" at 90.5,41.9 h1.5
  text "CUTOUT" at 1.6,29.8 h2 r90
  text "CUTOUT" at 96.4,29.7 h2 r90
  text "CUTOUT" at 96.6,8 h2 r90
  text "CUTOUT" at 1.5,7.6 h2 r90
Bottom Overlay:
  drawing of 609 lines, arcs and shapes, not listed
  text "PCI-E 6 or 8 pin" at 56.2,87.5 h2 r90
  text "OHW 1.0" at 98.7,74.3 h2.5
  text "! Maximum 6 Modules !" at 99.3,58 h2 r90
  text ".net" at 88.273,21.512 h2
  text "MegAxone" at 99.273,21.512 h3

## Text inside footprints (layer, text, board x,y; h text height)
C2: Top Overlay "+" at 84,81.3 h1.5 r90
C15: Top Overlay "+" at 84.2,39.3 h1.5 r180
C24: Top Overlay "+" at 84.5,62.1 h1.5 r180
LED2: Top Overlay "R" at 55.825,49.875 h1.8 r90; Top Overlay "G" at 54.075,49.8 h1.8 r90; Top Overlay "B" at 57.675,49.875 h1.8 r90